# Altium PCB PCB_Sensor_Node.PcbDoc
Units mil, origin at the board's own origin, x right, y up, seen from the top; angles counter-clockwise.
Board outline 1968.5 x 3149.61 mil, 2 copper layers (Top Layer, Bottom Layer); 41 components, 33 nets, 123 pads, 16 vias.
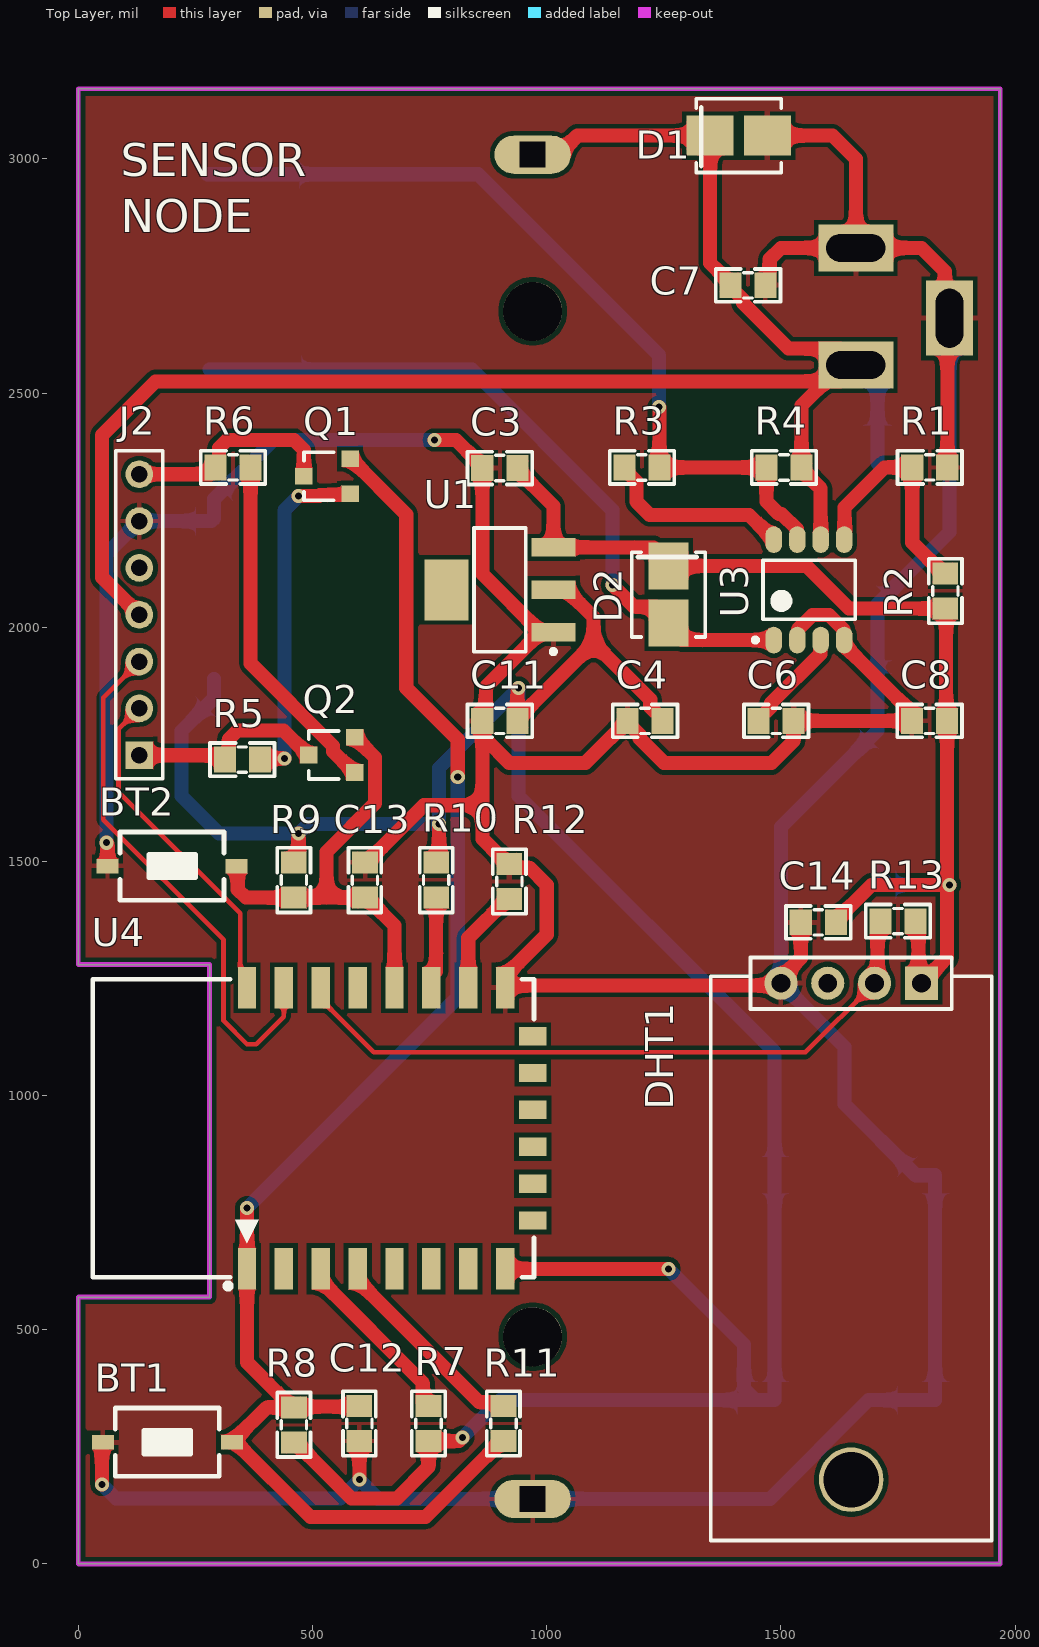
[diagram p0: Top Layer view]
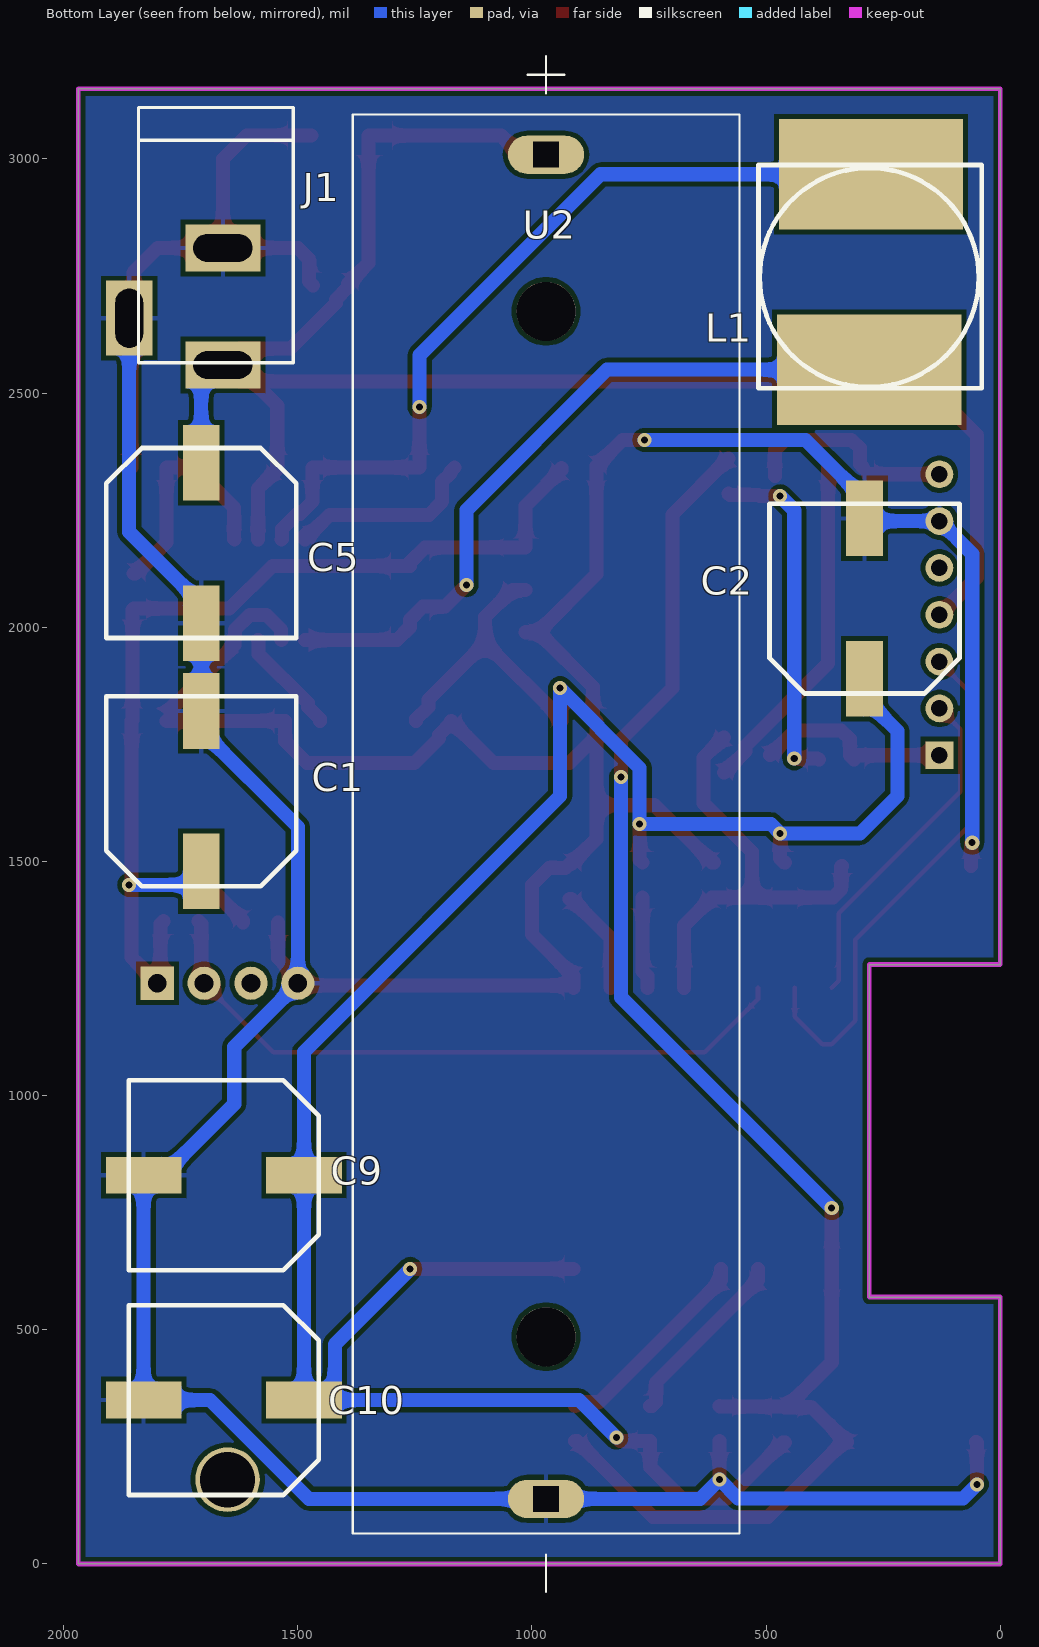
[diagram p1: Bottom Layer view, seen from below]
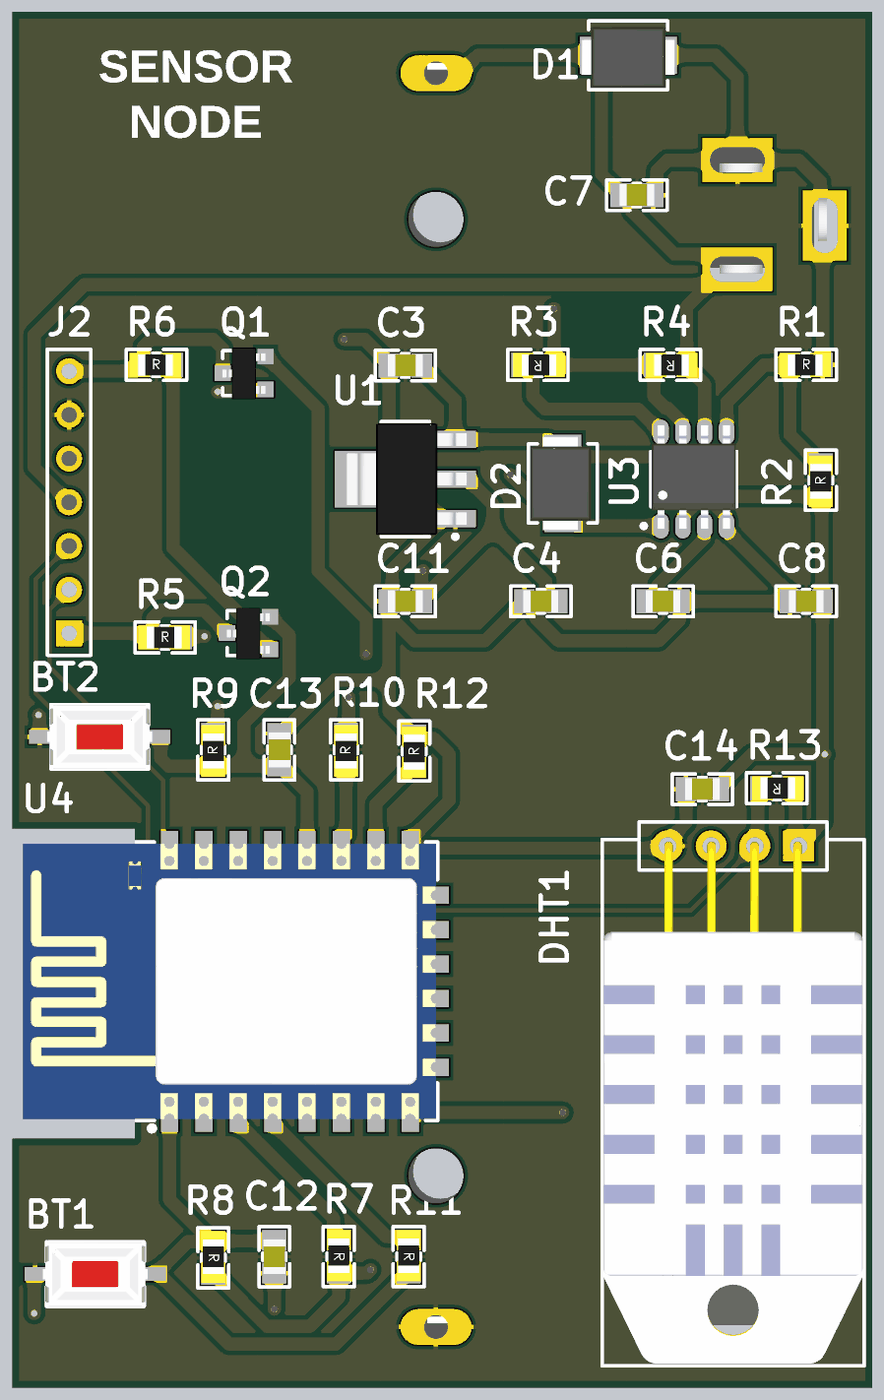
[diagram p2: 3D render of the assembled board from above, using the file's embedded part models]
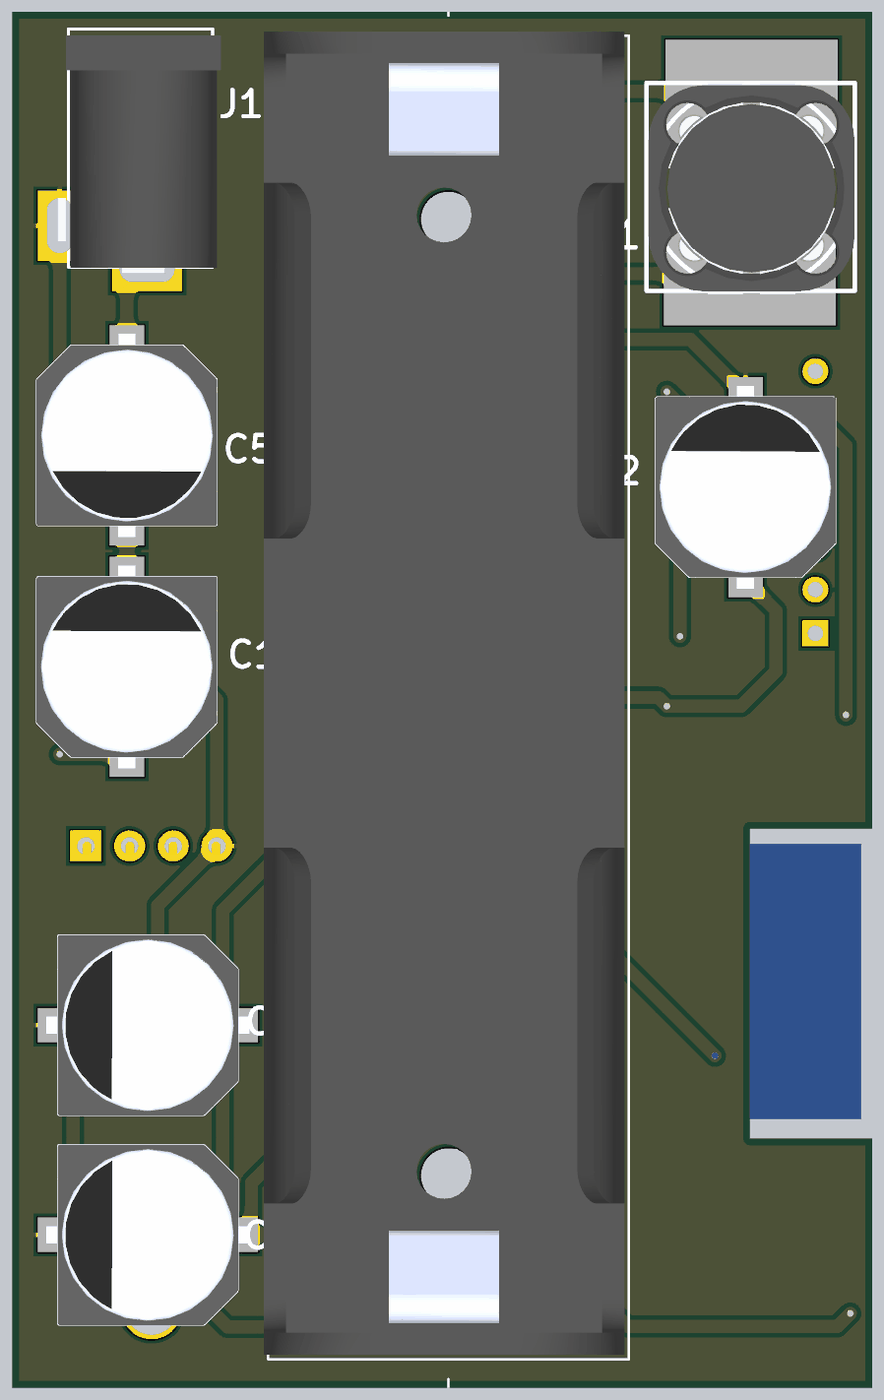
[diagram p3: 3D render of the assembled board from below, using the file's embedded part models]

## Layer stack, top to bottom
Top Solder: solder mask 0.4, Solder Resist, Dk 3.5
Top Layer: signal copper 1.4
Dielectric 1: dielectric 12.6, FR-4, Dk 4.8
Bottom Layer: signal copper 1.4
Bottom Solder: solder mask 0.4, Solder Resist, Dk 3.5

## Board outline
0,0 0,570 280,570 280,1280 0,1280 0,3149.61 1968.5,3149.61 1968.5,0

## Design rules (kind name [scope] priority, off if disabled: settings)
Clearance Clearance_1 [All] p1: gap=10 ignorepadtopadclearanceinfootprint=FALSE
Clearance POLYGON [INPolygon] p2: gap=30 ignorepadtopadclearanceinfootprint=FALSE
PolygonConnect [All] p1: connectstyle=Relief reliefconductorwidth=10 reliefentries=4 polygonreliefangle="90 Angle" airgapwidth=10
RoutingVias [All] p1: holewidth=28 width=50 viastyle="Through Hole" minholewidth=10 minwidth=20 maxholewidth=15 maxwidth=30
SolderMaskExpansion SolderMaskExpansion_1 [IsVia] p1: expansion=4 istentingtop=TRUE
SolderMaskExpansion [All] p2: expansion=4 istentingtop=FALSE
Width [All] p1: maxlimit=30 minlimit=10 preferedwidth=15
30 further rules are at their usual default settings.

## Components (designator, comment, footprint, x,y, rotation, side; value= is the part's Value field where it differs from the comment)
BT1 "Nut Nhan 2 Chan SMD 3x6x2.5" "Nut Nhan 2 Chan SMD 3x6x2.5" 190,260 r180 top
BT2 "Nut Nhan 2 Chan SMD 3x6x2.5" "Nut Nhan 2 Chan SMD 3x6x2.5" 200,1490 r180 top
C1 "1000uF" "tu nhom 10 (G)" 1706.24,1650 r90 bottom
C2 "1000uF" "tu nhom 10 (G)" 290,2061.26 r90 bottom
C3 "104" "tu 0805" 900,2340 r180 top
C4 "104" "tu 0805" 1210,1800 r180 top
C5 "1000uF" "tu nhom 10 (G)" 1706.24,2180 r270 bottom
C6 "102" "tu 0805" 1490,1800 r180 top
C7 "104" "tu 0805" 1430,2730 r180 top
C8 "104" "tu 0805" 1817.57,1800 r180 top
C9 "1000uF" "tu nhom 10 (G)" 1658.03,830 r0 bottom
C10 "1000uF" "tu nhom 10 (G)" 1658.03,350 r0 bottom
C11 "104" "tu 0805" 900,1800 r180 top
C12 "104" "tu 0805" 600,300 r270 top
C13 "104" "tu 0805" 611.58,1460 r90 top
C14 "104" "tu 0805" 1580,1370 r180 top
D1 "SS26" CAPM4336X25N 1410,3050 r180 top
D2 "SS26" CAPM4336X25N 1260,2070 r90 top
DHT1 "DHT22" DHT22-SMD 1650,1240 r180 top
J1 "JACK DC 5.5" "JACK DC 5.5" 1760,2685 r270 bottom value="Jac DC"
J2 "Header 7" HDR1X7 130,1726.77 r90 top
L1 "200uH - 3A SMD" "Cuon Cam 12x12x10" 516.22,2510.63 r180 bottom
Q1 "HF" SOT23 530.79,2322.6 r90 top value=C9014
Q2 "HF" SOT23 540.79,1727.4 r90 top value=C9014
R1 "2.2k" "tro smd 0805" 1817.68,2343.77 r0 top
R2 "6.8k" "tro smd 0805" 1848.57,2077.23 r90 top
R3 "220" "tro smd 0805" 1203.26,2338.77 r180 top
R4 "1R" "tro smd 0805" 1506.63,2338.77 r180 top
R5 "10k" "tro smd 0805" 350,1720 r0 top
R6 "10k" "tro smd 0805" 330,2343.77 r0 top
R7 "10k" "tro smd 0805" 750,300 r270 top
R8 "10k" "tro smd 0805" 462.61,297.23 r270 top
R9 "10k" "tro smd 0805" 457.61,1460.1 r90 top
R10 "10k" "tro smd 0805" 761.56,1460.1 r90 top
R11 "100" "tro smd 0805" 910,300 r270 top
R12 "10k" "tro smd 0805" 917.61,1457.23 r90 top
R13 "10k" "tro smd 0805" 1750,1370 r180 top
U1 "LM1117-3.3V" SOT223 900,2080 r90 top
U2 "BK-18650-PC2" BAT_BK-18650-PC2 970,1580 r270 bottom
U3 "MC34063" SOIC127P600X175-8N 1560,2080 r90 top
U4 "ESP8266 12" "ESP8266 12" 360,615.24 r90 top

## Footprints (in the part's own frame and the unit in brackets; to place one, negate y for a bottom-side part, rotate by r counter-clockwise, add the part's x,y. Pads: shape width x height; smd on the part's side, far side on the other; paste and mask are expansions set on the pad)
BAT_BK-18650-PC2 [mm]
  oval 2.07x4.14 hole 1.38 square: NEG(36.6,0) POS(-36.3,0)
  round 3.2 hole 3.2 unplated: ""(-27.805,0) ""(27.81,0)
  silkscreen extent -41.63,-10.49 41.63,10.49, body extent -38.73,-10.74 38.23,10.24, height 24.71
CAPM4336X25N [mm] "Molded Capacitor, 2-Leads, Body 4.33x3.63mm, IPC Medium Density"
  rect 2.55x2.15 smd: 1(-1.55,0) 2(1.55,0)
  silkscreen extent -2.3,-2 2.3,2, body extent -2.72,-1.65 2.72,1.91, height 2.49
"Cuon Cam 12x12x10" [mm] "Cuon Cam 12x12x10"
  rect 10x6 smd: 1(6.1,11.6) 2(6,1)
  silkscreen extent 0,0 12.1,12.1, body extent 0.1,-0.2 12.1,12.14, height 7.51
DHT22-SMD [mm]
  rect 1.8x1.8 hole 1.02: 1(-3.81,0)
  round 1.8 hole 1.02: 2(-1.27,0) 3(1.27,0) 4(3.81,0)
  round 3.5 hole 3: ""(0,26.924)
  silkscreen extent -7.62,-1.4 7.62,30.23, body extent -7.55,-0.25 7.55,30.1, height 1.5
"ESP8266 12" [mm] "ESP-12 Wi-Fi Module by AI-Thinker"
  rect 2.25x1 smd: 1(0.375,0) 2(0.375,-2) 3(0.375,-4) 4(0.375,-6) 5(0.375,-8) 6(0.375,-10) 7(0.375,-12) 8(0.375,-14) 15(15.625,-14) 16(15.625,-12) 17(15.625,-10) 18(15.625,-8) 19(15.625,-6) 20(15.625,-4) 21(15.625,-2) 22(15.625,0)
  rect 1x1.5 smd: 9(3,-15.5) 10(5,-15.5) 11(7,-15.5) 12(9,-15.5) 13(11,-15.5) 14(13,-15.5)
  silkscreen extent -0.7,-15.57 16.08,8.37, body extent 0,-15.49 16,8.51, height 2.75
HDR1X7 [mm] "Connector; Header; 7 Position"
  rect 1.5x1.5 hole 0.9: 1(0,0)
  round 1.5 hole 0.9: 2(2.54,0) 3(5.08,0) 4(7.62,0) 5(10.16,0) 6(12.7,0) 7(15.24,0)
  silkscreen extent -1.27,-1.27 16.51,1.27
"JACK DC 5.5" [mil] "Jac DC input"
  rect 100x160 hole 59.06 slot 125.98 at 90 deg: 1(125,100) 2(-125,100)
  rect 160x100 hole 59.06 slot 125.98 at 0 deg: 3(25,-100)
  silkscreen extent -425,-80 120,250, body extent -410,-105 134,269, height 434
"Nut Nhan 2 Chan SMD 3x6x2.5" [mm] "Switch SMD type"
  rect 1.2x0.8 smd: 1(-3.5,0) 2(3.5,0)
  silkscreen extent -2.82,-1.85 2.82,1.85, body extent -3.05,-1.85 3.05,1.85, height 2.5
SOIC127P600X175-8N [mm] "SOIC, 8-Leads, Body 4.90x3.90mm, Pitch 1.27mm, IPC Medium Density"
  oval 1.45x0.9 smd: 1(-2.725,1.905) 2(-2.725,0.635) 3(-2.725,-0.635) 4(-2.725,-1.905) 5(2.725,-1.905) 6(2.725,-0.635) 7(2.725,0.635) 8(2.725,1.905)
  silkscreen extent -2.85,-2.5 1.6,3.03, body extent -2.87,-2.45 3.13,2.45, height 1.75
SOT23 [mm] "SOT23"
  rect 0.9x0.95 smd: 1(-0.95,-1.25) 2(0,1.25)
  rect 0.9x0.95 smd mask+0: 3(0.95,-1.25)
  silkscreen extent -1.3,-0.38 1.3,1.25, body extent -1.52,-1.23 1.48,1.27, height 1.06
SOT223 [mm]
  rect 1x2.4 smd: 1(-2.3,-2.9) 2(0,-2.9) 3(2.3,-2.9)
  rect 3.3x2.4 smd: 4(0,2.9)
  silkscreen extent -3.47,-3.03 3.35,1.4, body extent -3.25,-3.56 3.25,3.4, height 1.68
"tro smd 0805" [mm]
  rect 1.2x1.4 smd: 1(-0.946,-0.061) 2(0.954,-0.061)
  silkscreen extent -1.75,-0.97 1.75,0.84, body extent -1.56,-0.76 1.44,0.64, height 0.53
"tu 0805" [mm] "Compoment SMD 80x50mil"
  rect 1.2x1.4 smd: 1(-0.946,-0.003) 2(0.954,-0.003)
  silkscreen extent -1.75,-0.89 1.75,0.89, body extent -1.01,-0.64 1.01,0.63, height 0.61
"tu nhom 10 (G)" [mm]
  rect 4.1x2 smd: 1(-4.35,0) 2(4.35,0)
  silkscreen extent -5.15,-5.15 5.15,5.15, body extent -5.9,-5.25 5.9,5.25, height 10.5

## Part data
C1 C2 C5 C9 C10: library part "Tu Nhom 1000uF 10V", "Dán", Chung_Loai=Dán, Don_Vi=Con, Ma_Hang=MH007515, So_Chan=2, Ten_Linh_Kien="Tụ Nhôm 1000uF 10V"
C3 C4 C7 C8 C11 C12 C13 C14: library part "Tu 0805 104 50V 10%", "Dán", Chung_Loai=Dán, Don_Vi=Con, Ma_Hang=MH004551, So_Chan=2, Ten_Linh_Kien="Tụ 0805 104-100nF 10% 50V"
C6: library part "Tu 0805 102 50V 10%", "Dán", Chung_Loai=Dán, Don_Vi=Con, Ma_Hang=MH004549, So_Chan=2, Ten_Linh_Kien="Tụ 0805 102-1nF 10% 50V"
D1 D2: library part "Diode SS26", "Dán", Chung_Loai=Dán, Don_Vi=Con, Ma_Hang=MH002211, Ten_Linh_Kien="Diode SS14 DO214 Schottky 1A 40V ( 1N5819 DO214)"
DHT1: Manufacturer="W¨¹rth Elektronik eiSos GmbH", partNo=613004143121, ComponentLink1 Description=Manufacturer, ComponentLink1URL=http://www.we-online.com, ComponentLink2 Description=Datasheet, ComponentLink2URL=http://katalog.we-online.de/em/datasheet/6130xx143121.pdf, Created by="Karrer Zheng", Created Date="29 March 2013", NoPins=04
J2: "Header, 7-Pin", LatestRevisionDate=17-Jul-2002, LatestRevisionNote="Re-released for DXP Platform.", Publisher="Altium Limited"
L1: library part "CUON CAM 100uH SMD", "Dán", Chung_Loai=Dán, Don_Vi=Con, Ten_Linh_Kien="Cuộn Cảm 100uH 7x7x4MM CD74"
Q1 Q2: library part "C1815 HF SMD", "NPN transistor"
R1 R2 R3 R5 R6 R7 R8 R9 R10 R12 R13: library part "Tro 0805 1% 10k", "Dán", Chung_Loai=Dán, Don_Vi=Con, Ma_Hang=MH005473, So_Chan=2, Ten_Linh_Kien="Trở 0805 1% 10k"
R4: library part "Tro 0805 1% 1R", "Dán", Chung_Loai=Dán, Don_Vi=Con, Ma_Hang=MH004177, So_Chan=2, Ten_Linh_Kien="Trở 0805 1% 1R"
R11: library part "Tro 0805 5% 100R", "Dán", Chung_Loai=Dán, Don_Vi=Con, Ma_Hang=MH005251, So_Chan=2, Ten_Linh_Kien="Trở 0805 5% 100R"
U1: library part LM1117, "800mA Low-Dropout Linear Regulator", Creator="Nguyen Ba Bien", Website=http://group3i.net
U2: "Battery Holder _Open_ 18650 1 Cell PC Pin", Package=None, Availability=Unavailable, MF=MPD, MP=BK-18650-PC2, Price=None, SnapEDA_Link=https://www.snapeda.com/parts/BK-18650-PC2/MPD/view-part/4480461/?ref=snap
U4: "ESP8266 12 22 Pin", IC=ESP8266-EX, Vendor=Ai-thinker
BT1 BT2: Ma_Hang=MH001036, Ten="Nút Nhấn 2 Chân 3x6x2.5MM SMD"

## Via types
v1: diameter 30, hole 15, Top Layer to Bottom Layer, tented both sides, 16 vias

## Nets (pads, with @x,y where several pads share a name; then routed paths per layer and width w, separated by ;. In a path a pad name is that pad's centre, name@x,y a point inside that pad or via, vN(x,y) a via of type N, cw(c..) or ccw(c..) an arc to the next point about the centre after c; other vN are vias at no path point)
+3V3: C2.1 C4.1 C9.1 C10.1 C11.1 R7.2 R8.2 R9.2 R10.2 U1.2 U4.8 | length 5724.2
  Top Layer w30: R9.2 461.38,1497.68 470,1506.3 v1(470,1560) ; R8.2 464.15,259.65 528.1,195.7 528.1,195.33 583.43,140 680,140 747.61,207.61 R7.2 812.43,262.43 v1(820,270) ; R10.2 770,1503.72 v1(770,1580) ; U4.8 v1(1260,630) ; C11.1 C11.1@937.23,1804.07 ; v1(940,1870) 937.23,1867.23 C11.1@937.23,1804.07 ; U1.2 1041.73,2080 1100,2021.73 1100,1966.84 ; C4.1 1247.23,1804.07 1221.05,1830.25 1221.05,1845.8 1100,1966.84 ; C11.1@937.23,1804.07 1100,1966.84
  Bottom Layer w30: C2.1 290,1848.66 220,1778.66 220,1640 300,1560 v1(470,1560) 490,1580 v1(770,1580) 770,1700 v1(940,1870) 940,1640 1486.77,1093.23 C9.1 C10.1 C10.1@1445.43,350 ; v1(820,270) 900,350 C10.1@1445.43,350 ; v1(1260,630) 1421.06,468.94 1421.06,374.37 C10.1@1445.43,350
+5V: C1.1 C3.1 C8.1 C14.1 D2.2 DHT1.1 R2.1 R13.1 U1.3 | length 2505.3
  Top Layer w30: C3.1 937.23,2336.2 1014.17,2259.25 U1.3 1228.35,2170.55 1260,2138.9 D2.2 1554.5,2131.02 1645.52,2040 R2.1 1852.89,2038.08 1852.89,1802.05 C8.1 v1@1854.8,1450 ; C14.1 1617.23,1374.07 1693.16,1450 v1@1854.8,1450 ; R13.1 1793.61,1366.01 1793.61,1246.39 DHT1.1 1854.8,1294.8 v1@1854.8,1450 ; v1(1860,1450) v1@1854.8,1450
  Bottom Layer w30: C1.1 1706.24,1474.37 1730.61,1450 v1(1860,1450)
ADC: U4.2
CS: U4.9
DTR: J2.1 Q2.2 R5.1 | length 433.9
  Top Layer w30: J2.1 304.15,1726.77 312.77,1718.15 R5.1 321.39,1726.23 321.39,1761.39 340,1780 437.99,1780 490.59,1727.4 Q2.2
EN: R7.1 U4.3 | length 390.4
  Top Layer w30: U4.3 517.48,605.39 735.05,387.83 735.05,345.85 743.67,337.23 R7.1
GND: BT1.2 BT2.2 C1.2 C2.2 C3.2 C4.2 C5.2 C6.1 C7.1 C8.2 C9.2 C10.2 C11.2 C12.2 C13.2 C14.2 D1.1 DHT1.4 J1.2 J1.3 J2.6 R1.2 R12.2 U1.1 U2.NEG U3.2 U3.4 U4.15 | length 11473.5
  Top Layer w30: v1(50,170) 50,259.25 50.75,260 BT1.2 ; v1(60,1540) 62.2,1537.8 BT2.2 ; C12.2 599.87,180.13 v1(600,180) ; C13.2 615.66,1497.57 738.08,1620 862.43,1620 ; v1(760,2400) 806.5,2400 862.43,2344.07 C3.2 862.43,2113.64 U1.1@986.61,1989.45 ; 871.05,1758.95 920,1710 1082.29,1710 C4.2@1159.87,1787.57 ; U4.15 U4.15@911.18,1230.51 ; U1.1 U1.1@986.61,1989.45 ; C4.2 1172.43,1796.2 1198.61,1770.02 1198.61,1762.22 1250.83,1710 1480,1710 1527.23,1757.23 C6.1 C8.2 1771.38,1808.76 1771.38,1825.51 1635,1961.89 U3.4 1633.96,1973.76 1633.96,1994.99 1602.69,2026.26 1567.31,2026.26 1536.04,1994.99 1536.04,1973.76 U3.2 ; C7.1 1475.85,2738.76 1475.85,2785.85 1500,2810 J1.2 ; D1.1 1610,3050 1660,3000 J1.2 ; C14.2 1542.43,1293.48 1500,1251.06 DHT1.4 1495.2,1235.2 915.87,1235.2 U4.15@911.18,1230.51 ; R1.2 1855.25,2655.25 J1.3 1850,2670 1850,2760 1800,2810 J1.2 ; 862.43,1620 862.43,1548.44 916.06,1494.8 R12.2 928.62,1486.18 963.82,1486.18 1000,1450 1000,1343.82 911.18,1255 U4.15@911.18,1230.51 ; 862.43,1620 C11.2 869.86,1807.57 869.86,1872.69 U1.1@986.61,1989.45
  Bottom Layer w30: v1(50,170) 80,140 560,140 v1(600,180) 640.94,139.06 U2.NEG 1476.26,139.06 1687.21,350 C10.2 C9.2 1787.95,830 1635.7,982.25 1635.7,1104.3 DHT1.4 1500,1573.68 1706.24,1779.92 C1.2 C5.2 1706.24,2050.08 1860,2203.83 J1.3 ; v1(60,1540) 60,2156.77 J2.6 284.25,2226.77 C2.2 290,2273.86 416.14,2400 v1(760,2400)
GPIO0: BT2.1 C13.1 Q2.3 R9.1 U4.18 | length 954.9
  Top Layer w30: BT2.1 339.25,1490 340,1489.25 340,1440.45 357.57,1422.87 R9.1 460.05,1422.82 530,1422.82 ; Q2.3 590.98,1764.8 633.7,1722.09 633.7,1624.31 530,1520.6 530,1422.82 ; U4.18 674.96,1363.47 615.66,1422.77 C13.1 C13.1 530,1422.82
GPIO1: J2.2 U4.22 | length 728.5
  Top Layer w10: J2.2 85.47,1782.25 85.47,1649.25 345.31,1389.41 345.31,1245.08 U4.22
GPIO2: R10.1 U4.17 | length 196.7
  Top Layer w30: U4.17 753.7,1255 763.96,1265.26 R10.1
GPIO3: J2.3 U4.21 | length 1140.4
  Top Layer w10: J2.3 53.23,1850 53.23,1589.2 310,1332.43 310,1160 360,1110 380,1110 438.74,1168.74 U4.21
GPIO4: U4.19
GPIO5: DHT1.2 R13.2 U4.20 | length 1452.8
  Top Layer w10: U4.20 517.48,1205.79 630.91,1092.36 1552.36,1092.36 DHT1.2
  Top Layer w30: DHT1.2 1706.21,1246.21 1706.21,1366.18 R13.2
GPIO9: U4.11
GPIO10: U4.12
GPIO12: U4.6
GPIO13: U4.7
GPIO14: U4.5
GPIO15: R12.1 U4.16 | length 228.2
  Top Layer w30: U4.16 832.44,1336.38 916.06,1420 R12.1
GPIO16: R11.1 U4.4 | length 447.1
  Top Layer w30: U4.4 596.22,605.39 855.76,345.85 898.98,345.85 R11.1
MISO: U4.10
MOSI: U4.13
NetC6_2: C6.2 U3.3 | length 227.5
  Top Layer w30: C6.2 1452.43,1804.07 1478.61,1830.25 1478.61,1838.05 1583.96,1943.4 1583.96,1971.68 U3.3
NetD2_1: D2.1 L1.2 U3.1 | length 1547.1
  Top Layer w30: v1(1140,2090) 1185.83,2044.17 1232.68,2044.17 1260,2016.85 D2.1 1260,2001.1 1288.39,1972.72 U3.1
  Bottom Layer w30: L1.2 840,2550 1140,2250 v1(1140,2090)
NetL1_1: L1.1 R3.1 R4.2 U3.7 | length 1777.1
  Top Layer w30: v1(1240,2470) 1240.49,2469.51 R3.1 R4.2 1469.06,2268.61 1495.46,2242.21 1501.31,2242.21 1533.96,2209.56 1533.96,2188.32 U3.7
  Bottom Layer w30: L1.1 853.56,2967.32 1240,2580.88 v1(1240,2470)
NetQ1_1: Q1.1 R5.2 | length 737.9
  Top Layer w30: R5.2 389.97,1720 v1(440,1720) ; v1(470,2279.88) 513.7,2279.88 516.3,2282.48 577.28,2282.48 Q1.1
  Bottom Layer w30: v1(440,1720) 440,2249.88 v1(470,2279.88)
NetQ2_1: Q2.1 R6.2 | length 744.1
  Top Layer w30: R6.2 367.57,1923.17 543.87,1746.88 543.87,1735.14 589.02,1690 Q2.1
NetR1_1: R1.1 R2.2 U3.5 | length 507
  Top Layer w30: U3.5 1636.04,2188.32 1636.04,2256.04 1721.38,2341.38 R1.1 1780.45,2181.39 1847.03,2114.8 R2.2
NetR3_2: R3.2 U3.8 | length 416
  Top Layer w30: R3.2 1174.31,2332.55 1174.31,2328.61 1191.87,2311.05 1191.87,2268.13 1220,2240 1432.28,2240 1473.13,2199.15 1482.49,2199.15 1485,2196.64 U3.8
RESET: BT1.1 C12.1 Q1.3 R8.1 R11.2 U4.1 | length 3361.8
  Top Layer w30: BT1.1 BT1.1@335.67,260 ; v1(360,760) U4.1 360,430.73 R8.1@456.28,334.46 ; Q1.3 580.98,2360 700,2240.98 700,1870 810,1760 v1(810,1680) ; C12.1 598.48,335.84 461.6,335.84 R8.1 R8.1@456.28,334.46 ; R11.2 903.67,262.43 741.24,100 495.67,100 BT1.1@335.67,260 ; BT1.1@335.67,260 336.42,260.75 336.42,268.62 402.25,334.46 R8.1@456.28,334.46
  Bottom Layer w30: v1(360,760) 810,1210 v1(810,1680)
RTS: J2.7 Q1.2 R6.1 | length 449.8
  Top Layer w30: J2.7 R6.1@282.1,2326.77 ; R6.1 300,2348.61 300,2382.43 317.57,2400 460,2400 481.57,2378.43 Q1.2
SCK: U4.14
VIN: C5.1 C7.2 D1.2 J1.1 J2.4 R4.1 U2.POS U3.6 | length 3777.6
  Top Layer w30: J2.4 50,2106.77 50,2410 165,2525 J1.1@1595,2525 ; U2.POS 1024.68,3009.13 1065.55,3050 D1.2 1348.98,2777.52 1392.43,2734.07 C7.2 1392.43,2726.2 1418.61,2700.02 1418.61,2692.22 1515.83,2595 1625,2595 J1.1 1625,2525 J1.1@1595,2525 ; U3.6 1585,2296.09 1543.86,2337.23 R4.1 1543.86,2473.86 J1.1@1595,2525
  Bottom Layer w30: J1.1 1671.24,2560 1706.24,2525 C5.1
pads on no net: DHT1. DHT1.3 J2.5 U1.4 U2.

## Polygon pours and split planes (outlines as drawn)
GND on Top Layer "GND_L01_P000" (solid, remove dead copper, pour order 0): -410,3540 2290,3540 2450,3380 2450,-470 -510,-470 -730,-250
GND on Bottom Layer "GND_L02_P001" (solid, remove dead copper, pour order 1): -480,3440 -420,3380 2430,3380 2430,-400 2250,-580 2040,-370 -570,-370

## Keep-outs
Keep-Out Layer:
  the board outline again, w10

## Silkscreen, mask and mechanical layers (free items; w line width, h text height)
Top Overlay:
  text "SENSOR  / NODE" at 90.1,2820 h120

## Text inside footprints (layer, text, board x,y; h text height)
U4: Mechanical 13 "ANTENNA AREA" at 50,620.24 h10 r90; Mechanical 13 "CUTOUT POLYGON" at 70,620.24 h10 r90